# Altium PCB PCB1.PcbDoc
Units mil, origin at the board's own origin, x right, y up, seen from the top; angles counter-clockwise.
Board outline 881.25 x 2795 mil, 2 copper layers (Top Layer, Bottom Layer); 23 components, 22 nets, 72 pads, 10 vias.
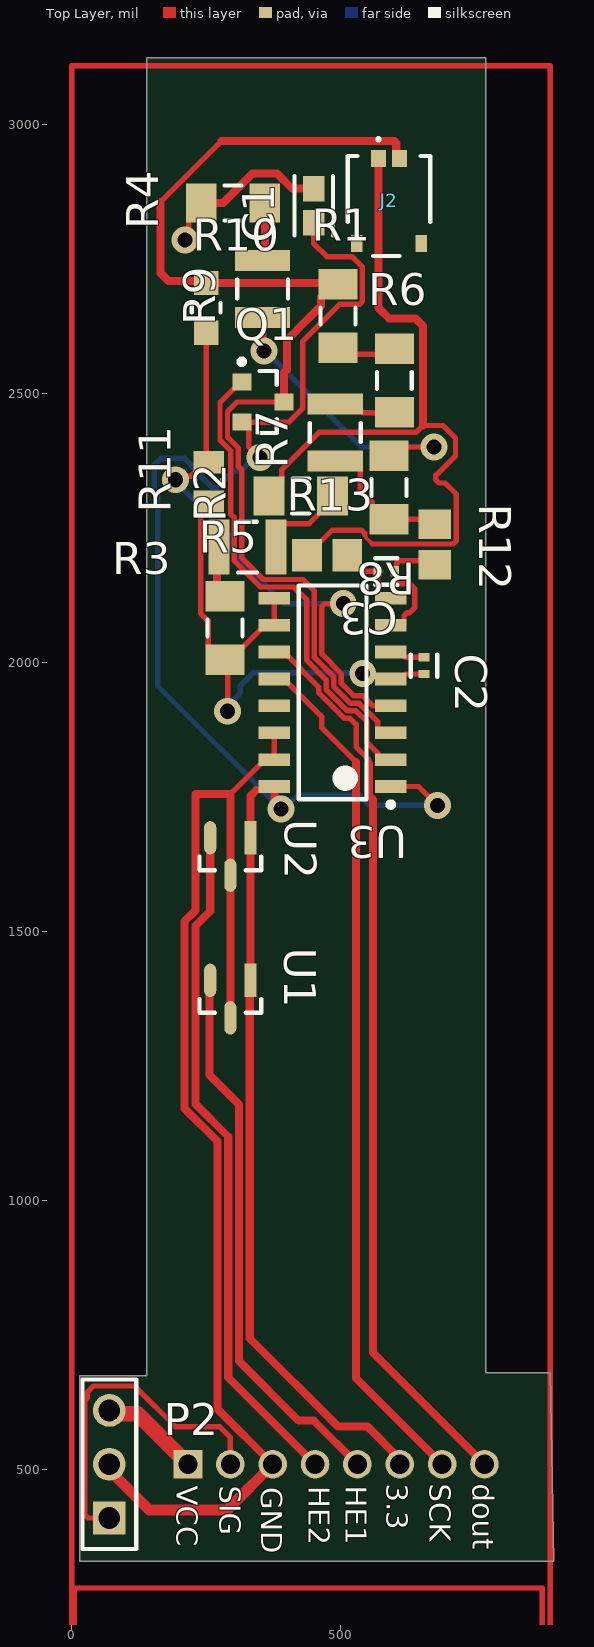
[diagram p0: Top Layer view]
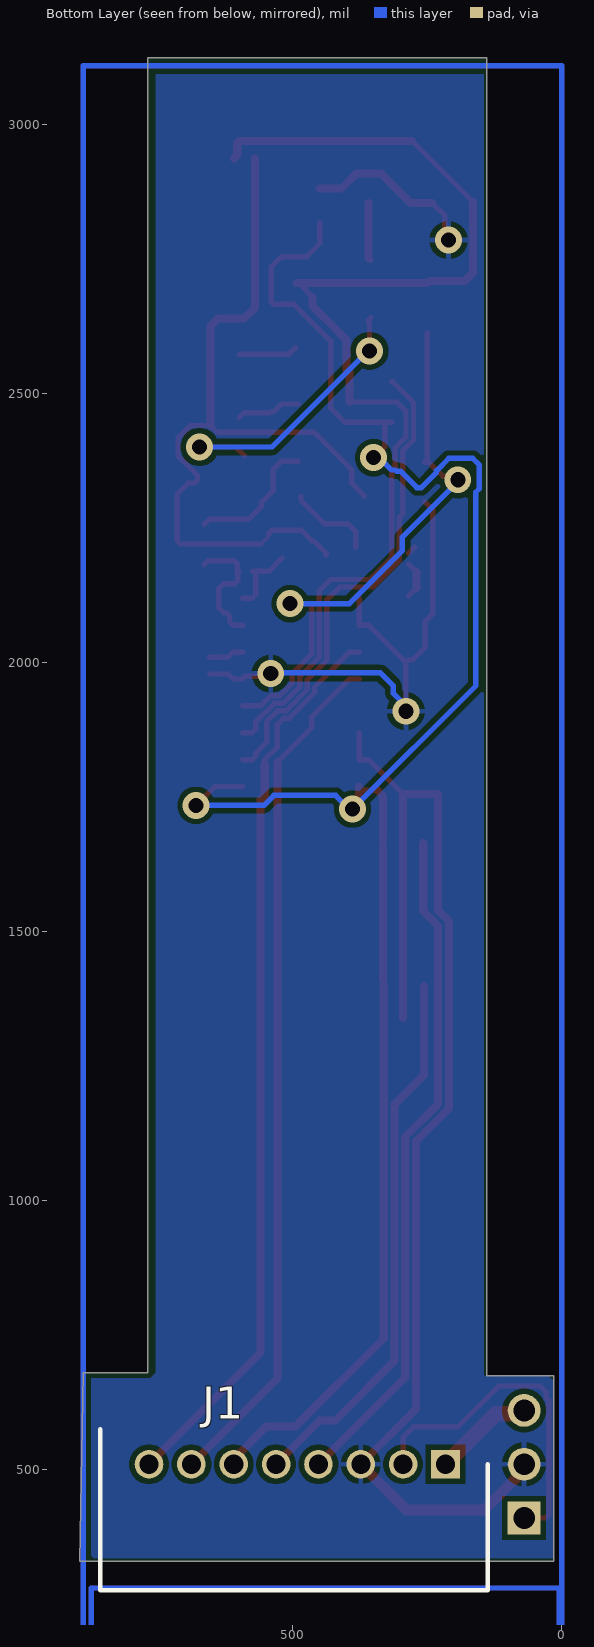
[diagram p1: Bottom Layer view, seen from below]

## Layer stack, top to bottom
Top Solder: solder mask 0.4, Solder Resist, Dk 3.5
Top Layer: signal copper 1.4
Dielectric 1: dielectric 12.6, FR-4, Dk 4.8
Bottom Layer: signal copper 1.4
Bottom Solder: solder mask 0.4, Solder Resist, Dk 3.5

## Board outline
896.25,330 890,680 770,680 770,3125 140,3125 140,675 15,675 15,330

## Design rules (kind name [scope] priority, off if disabled: settings)
Clearance [All] p1: gap=10 ignorepadtopadclearanceinfootprint=FALSE except(0: Arc-Hole Track-Hole SMDPad-Hole THPad-Hole Via-Hole Fill-Hole Poly-Hole Region-Hole Text-Hole; 3.94: Arc-Arc Arc-Track Arc-SMDPad Track-Track Track-SMDPad)
PolygonConnect [All] p1: connectstyle=Relief reliefconductorwidth=10 reliefentries=4 polygonreliefangle="90 Angle" airgapwidth=10
RoomDefinition "hallbridge and connectors" [InComponentClass('hallbridge and connectors')] p1: confinementstyle=ConfineIn formatcopy=TRUE lockcomponents=FALSE outline 935,330 3015,330 3015,2060 935,2060
RoutingCorners [All] p1: cornerstyle=Round minsetback=100 maxsetback=100
RoutingVias RoutingVias_1 [All] p1: holewidth=28 width=50 viastyle="Through Hole" minholewidth=28 minwidth=50 maxholewidth=28 maxwidth=50
RoutingVias [All] p2: holewidth=28 width=50 viastyle="Through Hole" minholewidth=28 minwidth=50 maxholewidth=28 maxwidth=50 useviatemplates=TRUE viatemplateguid#1={90312A89-7FEA-4FBE-BA22-91A5D80FFBB0} viatemplatename#1=v127h71
SolderMaskExpansion [All] p1: expansion=4 istentingtop=FALSE
Width [All] p1: maxlimit=196.85 minlimit=3.94 preferedwidth=15 bottomlayer_minwidth=10 bottomlayer_maxwidth=10 bottomlayer_prefwidth=10 minimp=50.000000 maximp=50.000000 favimp=50.000000
29 further rules are at their usual default settings.

## Components (designator, comment, footprint, x,y, rotation, side; value= is the part's Value field where it differs from the comment)
C1 "GRM188R60J106ME47D" FP-GRM188-0_1-e0_2_0_55-IPC_A 450,2850 r90 top
C2 "GRM155R71C104KA88D" FP-GRM15-MFG 655,1995 r270 top value=0.10μF
C3 "GRM155R71C104KA88D" FP-GRM15-MFG 585,2170 r180 top value=0.10μF
J1 "53254-0870" SHDRRA8W50P0X200_1X8_1800X730X440P 216.26,510 r0 bottom
J2 "212134-0002" 2121340002 590.04,2849.29 r0 top
P2 "TSW-103-07-L-S" SMTC-TSW-103-07-X-S 70,410 r90 top
Q1 "MMBT4403LT1G" ONSC-SOT-23-3-318-08_V 355.63,2485 r0 top
R1 "TNPU1206100RBZEN00" RESC3216X65X50ML15T25 495,2645 r90 top
R2 "TNPU1206100RBZEN00" RESC3216X65X50ML15T25 425.94,2310 r180 top
R3 "CRCW1210150RFKTA" RESC3225X60X45LL20T20 326.85,2215 r0 top
R4 "TNPU1206100RBZEN00" RESC3216X65X50ML15T25 300,2855 r180 top
R5 "TNPU1206100RBZEN00" RESC3216X65X50ML15T25 285,2065 r90 top
R6 "TNPU1206100RBZEN00" RESC3216X65X50ML15T25 600,2525 r90 top
R7 "CRCW1210150RFKTA" RESC3225X60X45LL20T20 490,2428.15 r90 top
R8 "TNPU1206100RBZEN00" RESC3216X65X50ML15T25 590,2325.94 r270 top
R9 "CRCW1210150RFKTA" RESC3225X60X45LL20T20 355,2695 r90 top
R10 "ERA6AEB203V" FP-ERA6A-MFG 250,2660 r90 top
R11 "CRCW08058K20FKEA" RESC2013X50X30NL20T20 255,2336.42 r90 top
R12 "ERA6AEB101V" RESC2013X60X40ML20T25 675,2220 r270 top
R13 "ERA6AEB101V" RESC2013X60X40ML20T25 475,2200 r0 top
U1 "TMAG5231B1DQDBZR" FP-DBZ0003A-IPC_B 295,1374.86 r270 top
U2 "TMAG5231B1DQDBZR" FP-DBZ0003A-IPC_B 295,1640 r270 top
U3 "HX711" SOIC127P600X160-16N 485,1945 r180 top

## Footprints (in the part's own frame and the unit in brackets; to place one, negate y for a bottom-side part, rotate by r counter-clockwise, add the part's x,y. Pads: shape width x height; smd on the part's side, far side on the other; paste and mask are expansions set on the pad)
2121340002 [mm]
  rect 0.7x0.8 smd: 1(-0.5,2.24) 2(0.5,2.24)
  rect 0.55x0.8 smd: MP1(-1.525,-1.76) MP2(1.525,-1.76)
  silkscreen extent -1.95,-2.36 1.95,3.2, body extent -10,-3.38 10,3.38, height 5.8
FP-DBZ0003A-IPC_B [mm]
  rect 1.574x0.572 smd paste+0 mask+0: 1(-0.885,0.95)
  rrect100% 1.574x0.572 smd paste+0 mask+0: 2(-0.885,-0.95) 3(0.885,0)
  silkscreen extent 0,-1.46 0.65,1.46, body extent -1.92,-1.71 1.92,1.71, height 0.25
FP-ERA6A-MFG [mm]
  rect 1.15x1.15 smd paste+0 mask+0: 1(-1.175,0) 2(1.175,0)
  silkscreen extent -0.23,-0.67 0.23,0.67, body extent -1.85,-0.77 1.85,0.77, height 0.25
FP-GRM15-MFG [mm]
  rect 0.4x0.5 smd paste+0 mask+0: 1(-0.4,0) 2(0.4,0)
  silkscreen extent -0.53,-0.63 0.53,0.63, body extent -0.7,-0.38 0.7,0.38, height 0.25
FP-GRM188-0_1-e0_2_0_55-IPC_A [mil]
  rect 47.57x39.85 smd paste+0 mask+0: 1(-31.57,0) 2(31.57,0)
  silkscreen extent -55,-36 55,36, body extent -75,-40 75,40, height 10
ONSC-SOT-23-3-318-08_V [mm] "SOT23, 3-Leads, Body 2.92x1.3mm, Pitch 0.95mm"
  rect 0.9x0.8 smd: 1(-1,0.95) 2(-1,-0.95) 3(1,0)
  silkscreen extent -1.12,-1.46 0.65,2.02, body extent -0.65,-1.46 0.65,1.46, height 1.11
RESC2013X50X30NL20T20 [mm] "Chip Resistor, 2-Leads, Body 2.00x1.25mm, IPC Medium Density"
  rect 1.05x1.45 smd: 1(-0.925,0) 2(0.925,0)
  silkscreen extent -0.1,-0.63 0.1,0.63, body extent -1.1,-0.72 1.1,0.72, height 0.5
RESC2013X60X40ML20T25 [mm] "Chip Resistor, 2-Leads, Body 2.00x1.25mm, IPC Low Density"
  rect 1.4x1.55 smd: 1(-0.95,0) 2(0.95,0)
  body extent -1.1,-0.72 1.1,0.72, height 0.6
RESC3216X65X50ML15T25 [mm] "Chip Resistor, 2-Leads, Body 3.20x1.60mm, IPC Low Density"
  rect 1.45x1.85 smd: 1(-1.5,0) 2(1.5,0)
  silkscreen extent -0.4,-0.82 0.4,0.82, body extent -1.68,-0.87 1.68,0.87, height 0.65
RESC3225X60X45LL20T20 [mm] "Chip Resistor, 2-Leads, Body 3.20x2.50mm, IPC High Density"
  rect 1x2.6 smd: 1(-1.35,0) 2(1.35,0)
  silkscreen extent -0.45,-1.2 0.45,1.2, body extent -1.7,-1.35 1.7,1.35, height 0.6
SHDRRA8W50P0X200_1X8_1800X730X440P [mm]
  rect 1.35x1.35 / inner round 1.35 / far side rect 1.35x1.35 hole 0.9: 1(0,0)
  round 1.35 hole 0.9: 2(2,0) 3(4,0) 4(6,0) 5(8,0) 6(10,0) 7(12,0) 8(14,0)
  silkscreen extent -2,-1.65 16.3,5.95, body extent -1.97,-1.27 16.03,6.03, height 4.2
SMTC-TSW-103-07-X-S [mm] ".025 SQ Post Terminal Strip Assembly, 1x3 Pins, Vertical, 2.54mm Pitch, Male"
  rect 1.55x1.55 hole 1.02: 1(0,0)
  round 1.55 hole 1.02: 2(2.54,0) 3(5.08,0)
  silkscreen extent -1.46,-1.27 6.54,1.27, body extent -1.27,-1.27 6.35,1.27, height 8.38
SOIC127P600X160-16N [mm] "SOIC, 16-Leads, Body 9.90x3.85mm, Pitch 1.27mm, IPC Medium Density"
  rect 1.5x0.6 smd: 1(-2.75,4.445) 2(-2.75,3.175) 3(-2.75,1.905) 4(-2.75,0.635) 5(-2.75,-0.635) 6(-2.75,-1.905) 7(-2.75,-3.175) 8(-2.75,-4.445) 9(2.75,-4.445) 10(2.75,-3.175) 11(2.75,-1.905) 12(2.75,-0.635) 13(2.75,0.635) 14(2.75,1.905) 15(2.75,3.175) 16(2.75,4.445)
  silkscreen extent -2.88,-5.05 1.6,5.42, body extent -2,-5.05 2,5.05, height 1.6

## Part data
C1: library part CMP-2006-02792-2, "Chip Multilayer Ceramic Capacitors for General Purpose, 0603, 10uF, X5R, 15%, 20%, 6.3V", Capacitance=10uF, Case Code (Imperial)=0603, Case Code (Metric)=1608, Dielectric=X5R, Max Operating Temperature=85°C, Min Operating Temperature=-55°C, Package Quantity=4000, Tolerance=20%, Voltage=6.3V, Case/Package=0603, Depth=0.8mm, Height=0.8mm, Lead Free="Lead Free", Length=1.6mm, Material=Ceramic, Mount="Surface Mount", Packaging="Tape and Reel", Radiation Hardening=No, REACH SVHC="No SVHC", Termination=SMD/SMT, Thickness=0.035inch, Voltage Rating=6.3V, Voltage Rating (DC)=6.3V, Width=0.031inch
C2 C3: library part CMP-2100-03641-2, "CAP CER 0.1UF 16V X7R 0402", Capacitance=0.10μF, Manufacturer=Murata, Package=GRM15, Temperature="-55°C to +125°C", Temperature Characteristic=X7R, Temperature Range High=+125°C, Temperature Range Low=-55°C, Tolerance=10%, Voltage Rating=16Vdc, Category=Cap, ComponentLink2Description=Datasheet, ComponentLink2URL=https://search.murata.co.jp/Ceramy/image/img/A01X/G101/ENG/GRM155R71H471KA01-01A.pdf, Device Class L1="Passive Components", Device Class L2=Capacitors, Device Class L3="Ceramic Capacitors", Digikey Description="CAP CER 0.1UF 16V X7R 0402", Height=0.55mm, Ipc Land Pattern Name=CAPC10050X219, Lead Free=yes, Manufacturer Part Number=GRM155R71C104KA88D, Material=Ceramic, Mouser Description="0402 0.1 uF 16V ±10 % Tolerance X7R SMT Multilayer Ceramic Capacitor", Octopart=https://octopart.com/grm155r71c104ka88d-murata-196880, RoHS=TRUE, Standoff Height=0mm
J1: library part CMP-003-000027-1, "Headers & Wire Housings 8CKT WTB R/A", Manufacturer_Name=Molex, Mouser Part Number=538-53254-0870, Datasheet Link=https://componentsearchengine.com/Datasheets/2/53254-0870.pdf, Design Item ID=53254-0870, Geometry.Height=4.4mm, Manufacturer_Part_Number=53254-0870, Mouser Price/Stock=https://www.mouser.co.uk/ProductDetail/Molex/53254-0870?qs=s16%252Be%252B8QgeFQnKbK1eobMw%3D%3D, Source=53254-0870.SchLib
J2: library part CMP-003-000033-1, "PICO-EZMATE PLUS1.0 PLUGASSY ETP LH 2CKT - Tape and Reel", Manufacturer_Name=Molex, Mouser Part Number=538-212134-0002, Datasheet Link=https://www.molex.com/pdm_docs/sd/2121340002_sd.pdf, Design Item ID=212134-0002, Geometry.Height=1.4mm, Manufacturer_Part_Number=212134-0002, Mouser Price/Stock=https://www.mouser.co.uk/ProductDetail/Molex/212134-0002?qs=hd1VzrDQEGhMEPSgG43Vcg%3D%3D, Source=212134-0002.SchLib
P2: library part CMP-1024-00334-1, "0.025\" SQ Post Header, Through-hole, Vertical, -55 to 125 degC, 2.54 mm Pitch, 3-Pin, Male, RoHS", Manufacturer=Samtec, Temperature Range="-55 to 125 degC", ComponentLink1Description="Manufacturer URL", ComponentLink1URL=http://www.samtec.com, ComponentLink2Description=Datasheet, ComponentLink2URL=http://www.samtec.com/documents/webfiles/pdf/TSW_TH.PDF, ComponentLink3Description="Package Specification", ComponentLink3URL=http://www.samtec.com/documents/webfiles/cpdf/TSW-XXX-XX-XXX-X-XX-XXX-MKT.pdf, DatasheetVersion=F-214, Mounting Technology=Through-hole, Orientation=Vertical, PackageDescription=".025[0.64] SQ. Post Terminal Strip Assembly", PackageReference=TSW-103-07-X-S, PackageVersion="DM, 8/1988", PartNumber=TSW-103-07-L-S, Pitch="2.54 mm", RoHS=True
Q1: library part CMP-1048-00539-1, "Switching Transistor, PNP Silicon, 3-Pin SOT-23, Pb-Free, Tape and Reel", Manufacturer="On Semiconductor", ComponentLink1Description="Manufacturer URL", ComponentLink1URL=http://www.onsemi.com/, ComponentLink2Description=Datasheet, ComponentLink2URL=http://www.onsemi.cn/pub_link/Collateral/MMBT4403LT1-D.PDF, ComponentLink3Description="Package Specification", ComponentLink3URL=http://www.onsemi.cn/pub_link/Collateral/318-08.PDF, DatasheetVersion="Rev. 12", fT Min (MHz)=200, IC Continuous (A)=-0.6, Mounting Technology="Surface Mount", PackageDescription="3-Pin Small Outline Transistor, Body 2.92 x 1.3 mm, Pitch 0.95 mm", PackageReference=SOT-23-3-318-08, PackageVersion="Rev. AP, 11/2009", Packing="Tape and Reel", PartNumber=MMBT4403LT1G, Polarity=PNP, RoHS=TRUE
R1 R2 R4 R5 R6 R8: library part CMP-2003-04597-1, Manufacturer="Vishay Dale", Part Number=TNPU1206100RBZEN00
R3 R7 R9: library part CMP-2005-00637-1, Manufacturer="Vishay Dale", Part Number=CRCW1210150RFKTA
R10: library part CMP-2001-00610-2, "RES 20K OHM 0.1% 1/8W 0805", Case Code (Imperial)=0805, Case Code (Metric)=2012, Max Operating Temperature=155°C, Max Power Dissipation=125mW, Min Operating Temperature=-55°C, Package Quantity=1, Resistance=20kR, Resistance Tolerance=0.1%, Resistor Type="Thin Film", Temperature Coefficient=25ppm/°C, Voltage Rating=100V, Case/Package=0805, Construction=Rectangular, Contact Plating=Tin, Depth=1.25mm, Features="Automotive AEC-Q200", Height=0.5mm, Lead Free="Lead Free", Length=2mm, Military Standard=Not, Mount="Surface Mount", Number of Pins=2, Number of Terminations=2, Packaging="Tape and Reel", Power Rating=125mW, Radiation Hardening=No, REACH SVHC="No SVHC", RoHS Compliant=Yes, Series=ERA-6A, Size Code=0805, Technology="THIN FILM", Termination=SMD/SMT, Tolerance=0.1%, Voltage Rating (DC)=100V, Width=1.25mm
R11: library part CMP-2001-04148-1, Manufacturer="Vishay Dale", Part Number=CRCW08058K20FKEA
R12 R13: library part CMP-2001-00580-1, Manufacturer=Panasonic, Part Number=ERA6AEB101V
U1 U2: library part CMP-04937-000027-1, "LOW-POWER, LOW-VOLTAGE (1.65 V T"
U3: library part CMP-002-000002-1, "ADC, Delta-Sigma, 24-Bit, 1 Func, 2 Channel, Serial Access, PDSO16"

## Via types
v1: diameter 50, hole 28, Top Layer to Bottom Layer, 10 vias

## Nets (pads, with @x,y where several pads share a name; then routed paths per layer and width w, separated by ;. In a path a pad name is that pad's centre, name@x,y a point inside that pad or via, vN(x,y) a via of type N, cw(c..) or ccw(c..) an arc to the next point about the centre after c; other vN are vias at no path point)
3.3: C1.1 J1.6 Q1.2 U1.1 U2.1 U3.1 U3.16 | length 3546.6
  Top Layer w10: Q1.2 Q1.2@325.63,2447.6 ; U1.1@331.1,1401.3 U1.1@331.75,1401.95 ; 343.19,1763.19 369.92,1763.19 U3.16 ; v1(350,2381.42) 349.37,2381.42 328.98,2401.81 328.98,2444.25 Q1.2@325.63,2447.6 ; v1@376.73,1740.6 v1(389.2,1728.14) ; C1.1 450,2779.64 474.33,2755.31 521.34,2755.31 540.35,2736.3 540.35,2671.81 535.12,2666.57 498.03,2666.57 429.88,2598.43 429.88,2473.78 403.7,2447.6 Q1.2@325.63,2447.6 ; U3.1 645,1770 v1(680,1735) ; J1.6 J1.6@609.96,520.04
  Top Layer w15: U1.1@331.1,1401.3 331.1,743.9 495,580 550,580 J1.6@609.96,520.04 ; U1.1 U2.1@332.4,1664.86 ; U2.1 332.4,1752.4 343.19,1763.19 ; v1@376.73,1740.6 U3.16
  Bottom Layer w10: v1(350,2381.42) 339.36,2381.42 316.4,2358.45 309.33,2358.45 307.13,2356.26 300.06,2356.26 269.51,2325.7 261.22,2325.7 233.39,2353.54 233.39,2356.93 209.96,2380.36 165.86,2380.36 153.39,2367.89 153.39,2323.79 160,2317.18 160,1957.34 v1(389.2,1728.14) 394.92,1728.14 420.35,1753.56 535.48,1753.56 554.04,1735 v1(680,1735)
DOUT: J1.8 U3.11 | length 1688.3
  Top Layer w10: U3.11 394.45,2020 459.29,1955.16 459.29,1944.85 507.21,1896.92 517.52,1896.92 528.74,1885.71 528.74,1843.69 552.3,1820.13 552.3,1812.43
  Top Layer w15: 552.3,1812.43 552.3,1753.45 560,1745.75 560,717.44 J1.8
GND: C1.2 C2.2 J1.3 P2.2 R4.2 R5.1 R11.1 U1.3 U2.3 U3.5 U3.9 U3.10 U3.14 U3.15 | length 3669.2
  Top Layer w10: v1(210.72,2785.93) 217.4,2792.61 217.4,2831.46 R4.2 ; R11.1 239.65,2284.65 239.65,2091.81 253.58,2077.87 253.58,2029.49 277.13,2005.94 R5.1 ; v1(290,1910) 290,2000.98 359.02,2070 U3.10 U3.9 ; 295,1755.98 359.02,1820 U3.15 U3.14 ; 321.57,2895 321.57,2895.12 ; v1(541.1,1980) 546.1,1975 588.27,1975 U3.5 610.98,1970 620.24,1979.25 C2.2
  Top Layer w15: R4.2 281.57,2855 321.57,2895 ; U1.3 U2.3 295,1755.98 230,1755.98 230,1539.42 210.04,1519.46 210.04,1171.68 271.1,1110.61 271.1,612.64 J1.3 ; 321.57,2895.12 336.46,2910 381.65,2910 410.08,2881.57 C1.2
  Top Layer w19.68: P2.2@59.09,510 144.09,425 288.74,425 J1.3
  Bottom Layer w10: v1(290,1910) 290,1920.23 313.17,1943.4 313.17,1957.35 337.35,1981.52 539.58,1981.52 v1(541.1,1980)
NetC2_1: C2.1 U3.6 | length 65.6
  Top Layer w10: U3.6 610.98,2020 620.24,2010.75 C2.1
NetC3_1: C3.1 R12.2 U3.7 | length 241.7
  Top Layer w10: U3.7 610.98,2070 617.8,2076.81 617.8,2087.33 623.65,2093.19 629.01,2093.19 637.8,2101.98 637.8,2138.02 629.01,2146.81 608.2,2146.81 602.35,2152.67 602.35,2168.4 C3.1 603.62,2172.87 603.62,2184.14 609.48,2190 657.6,2190 R12.2@665,2182.6
NetC3_2: C3.2 R13.2 U3.8 | length 126.5
  Top Layer w10: R13.2@519.8,2195 544.8,2170 C3.2 ; U3.8@569.25,2126.81 C3.2 ; C3.2@575,2170 C3.2 ; U3.8@575.55,2120 U3.8
NetJ1_2: J1.2 P2.1 | length 638.3
  Top Layer w10: P2.1 30.35,410 24.49,415.86 24.49,628.85 29.14,633.51 29.14,644.14 40.51,655.51 117.02,655.51 192.53,580 275,580 295,560 J1.2
NetJ1_4: J1.4 U2.2 | length 1258.4
  Top Layer w15: U2.2@257.6,1664.86 257.6,1538.73 230.04,1511.17 230.04,1179.96 291.1,1118.9 291.1,671.38 J1.4
NetJ1_5: J1.5 U1.2 | length 1019.1
  Top Layer w15: U1.2@256.3,1398.7 256.3,1233.7 311.1,1178.9 311.1,701.83 421.91,591.03 450.2,591.03 J1.5
NetJ2_1: J2.1 R2.2 R13.1 | length 1528.7
  Top Layer w7: 544.65,2238.47 544.65,2236.34 547.4,2233.59 547.4,2232.6 559.09,2220.91
  Top Layer w10: R2.2 390.43,2333.54 390.43,2358.94 460.56,2429.07 550.04,2429.07 550.64,2428.46 640.12,2428.46 652.96,2441.31 690.08,2441.31 713.51,2417.87 713.51,2384.74 677.22,2348.45 677.22,2340.16 683.08,2334.3 694.3,2334.3 715,2313.61 715,2226.69 709.21,2220.91 559.09,2220.91 ; R13.1 437.6,2202.95 460.16,2225.51 463.11,2225.51 484.43,2246.83 538.79,2246.83 544.65,2240.98 544.65,2238.47
  Top Layer w15: J2.1 570.35,2660 590.35,2640 639.5,2640 652.96,2626.54 652.96,2441.31
NetQ1_1: Q1.1 U3.2 | length 907.8
  Top Layer w10: Q1.1 314.29,2522.4 275.67,2483.78 275.67,2414.02 296.06,2393.62 296.06,2276.14 302.32,2269.88 302.32,2189.46 350.84,2140.94 412.73,2140.94 437.13,2116.55 437.13,2004.56 473.23,1968.45 473.23,1950.62 512.99,1910.86 528.72,1910.86 548.74,1890.84 548.74,1851.98 568.74,1831.98 568.74,1826.81 575.55,1820 U3.2
NetR1_1: R1.1 R6.2 | length 109.9
  Top Layer w10: R1.1 506.89,2574.06 R6.2@600,2574.06
NetR2_1: R2.1 R3.2 | length 162.7
  Top Layer w10: R3.2@383.15,2215 383.15,2243.9 397.83,2258.58 441.46,2258.58 485,2302.13 R2.1
NetR3_1: R3.1 R5.2 | length 88.2
  Top Layer w10: R5.2@270,2139.06 R5.2 ; R3.1@270,2168.82 R3.1@284.97,2183.79 ; R3.1 R3.1@285,2203.7
  Top Layer w15: R5.2@270,2139.06 R3.1@270,2168.82
NetR4_1: R4.1 R9.2 | length 108.5
  Top Layer w10: R9.2 R9.2@359.06,2752.2
  Top Layer w15: R9.2@359.06,2752.2 R4.1
NetR6_1: R6.1 R7.2 | length 120.5
  Top Layer w10: R7.2 521.5,2481.3 536.18,2466.61 540.42,2466.61 542.04,2465 590.94,2465 R6.1@600,2455.94
NetR7_1: R7.1 R8.2 R12.1 | length 251.5
  Top Layer w10: R7.1 521.5,2375 536.18,2360.31 536.18,2320.71 558.58,2298.31 558.58,2290.43 582.13,2266.89 R8.2 655.51,2266.89 R12.1@665,2257.4
NetR8_1: R8.1 R9.1 | length 545.3
  Top Layer w10: R9.1 360,2636.85 357.5,2634.35 v1(357.5,2580) ; R8.1 606.31,2401.31 v1(673.51,2401.31)
  Bottom Layer w10: v1(357.5,2580) 360,2580 538.69,2401.31 v1(673.51,2401.31)
NetR10_1: R10.1 R11.2 U3.4 | length 1051.4
  Top Layer w10: v1(193.39,2340.36) 199.96,2346.93 221.23,2346.93 247.13,2372.83 R11.2 250,2377.83 R10.1 ; v1(505,2110) 470,2110 465,2105 465,2016.1 501.1,1980 501.1,1962.17 524.53,1938.73 541.26,1938.73 560,1920 U3.4
  Bottom Layer w10: v1(193.39,2340.36) 193.39,2336.97 296.33,2234.03 296.33,2208.67 395,2110 v1(505,2110)
PD_SCK: J1.7 U3.12 | length 1599.6
  Top Layer w10: U3.12 394.45,1970 465,1899.45 465,1879.15 528.74,1815.41
  Top Layer w15: 528.74,1815.41 528.74,669.96 J1.7
source: J2.2 Q1.3 R1.2 R10.2 U3.3 | length 2144.5
  Top Layer w10: 165,2856.65 278.35,2970 ; R10.2@246.26,2710 R10.2 ; Q1.3 307.56,2485 289.61,2467.05 289.61,2419.79 310,2399.4 310,2364.85 316.26,2358.59 316.26,2195.24 356.61,2154.88 430.12,2154.88 451.06,2133.94 451.06,2010.33 487.16,1974.23 487.16,1956.39 518.76,1924.8 534.49,1924.8 568.74,1890.55 568.74,1876.81 575.55,1870 U3.3 ; 395,2539.5 400,2544.5 ; R1.2@463.58,2680.51 R1.2@487.13,2704.06 ; R1.2@492.8,2706.26 R1.2
  Top Layer w15: 165,2856.65 165,2725 180,2710 R10.2@246.26,2710 ; R10.2 R1.2@492.8,2706.26 ; 278.35,2970 600,2970 603.44,2966.56 603.44,2943.76 J2.2 ; Q1.3 395,2539.5 ; 400,2544.5 400,2600 410.73,2610.73 410.92,2610.73 417.62,2617.43 417.62,2617.62 463.58,2663.58 R1.2@463.58,2680.51
VCC: J1.1 P2.3 | length 187.7
  Top Layer w29.53: P2.3 76.03,603.97 122.29,603.97 J1.1
pads on no net: J2.MP1 J2.MP2 U3.13

## Polygon pours and split planes (outlines as drawn)
GND on Bottom Layer "NONET_L-01_P-001" (solid, pour order 0): 140,3120 145,3115 145,675 25,675 10,660 15,655 15,335 870,335 880,345 880,670 765,670 755,680 755,3105

## Other copper
Multi-Layer:
  lines w10: 0,0 870,0 0,0 ; 0,5 890,5 890,3110 0,3110 0,5 ; 5,5 875,5 875,280 5,280 5,5

## Silkscreen, mask and mechanical layers (free items; w line width, h text height)
Top Overlay:
  text "3.3" at 585.91,474.09 h39.37 r270
  text "SCK" at 665.91,474.09 h39.37 r270
  text "dout" at 745.91,474.09 h39.37 r270
  text "VCC" at 195,470 h39.37 r270
  text "SIG" at 275,470 h39.37 r270
  text "HE1" at 510,470 h39.37 r270
  text "HE2" at 440.91,469.09 h39.37 r270
  text "GND" at 352.87,467.13 h39.37 r270

## Dimensions
287.59,1640 to 160,1375 on Top Overlay